# Altium PCB ECG_Board.PcbDoc (part 1 of 2)
Units mm, origin at the board's own origin, x right, y up, seen from the top; angles counter-clockwise.
Board outline 69.98 x 44.96 mm, 4 copper layers (Top Layer, Layer 1, Layer 2, Bottom Layer), stack 0.603 mm thick; 97 components, 77 nets, 390 pads, 9 vias.
Unrouted connection lines stored in the file: 228.
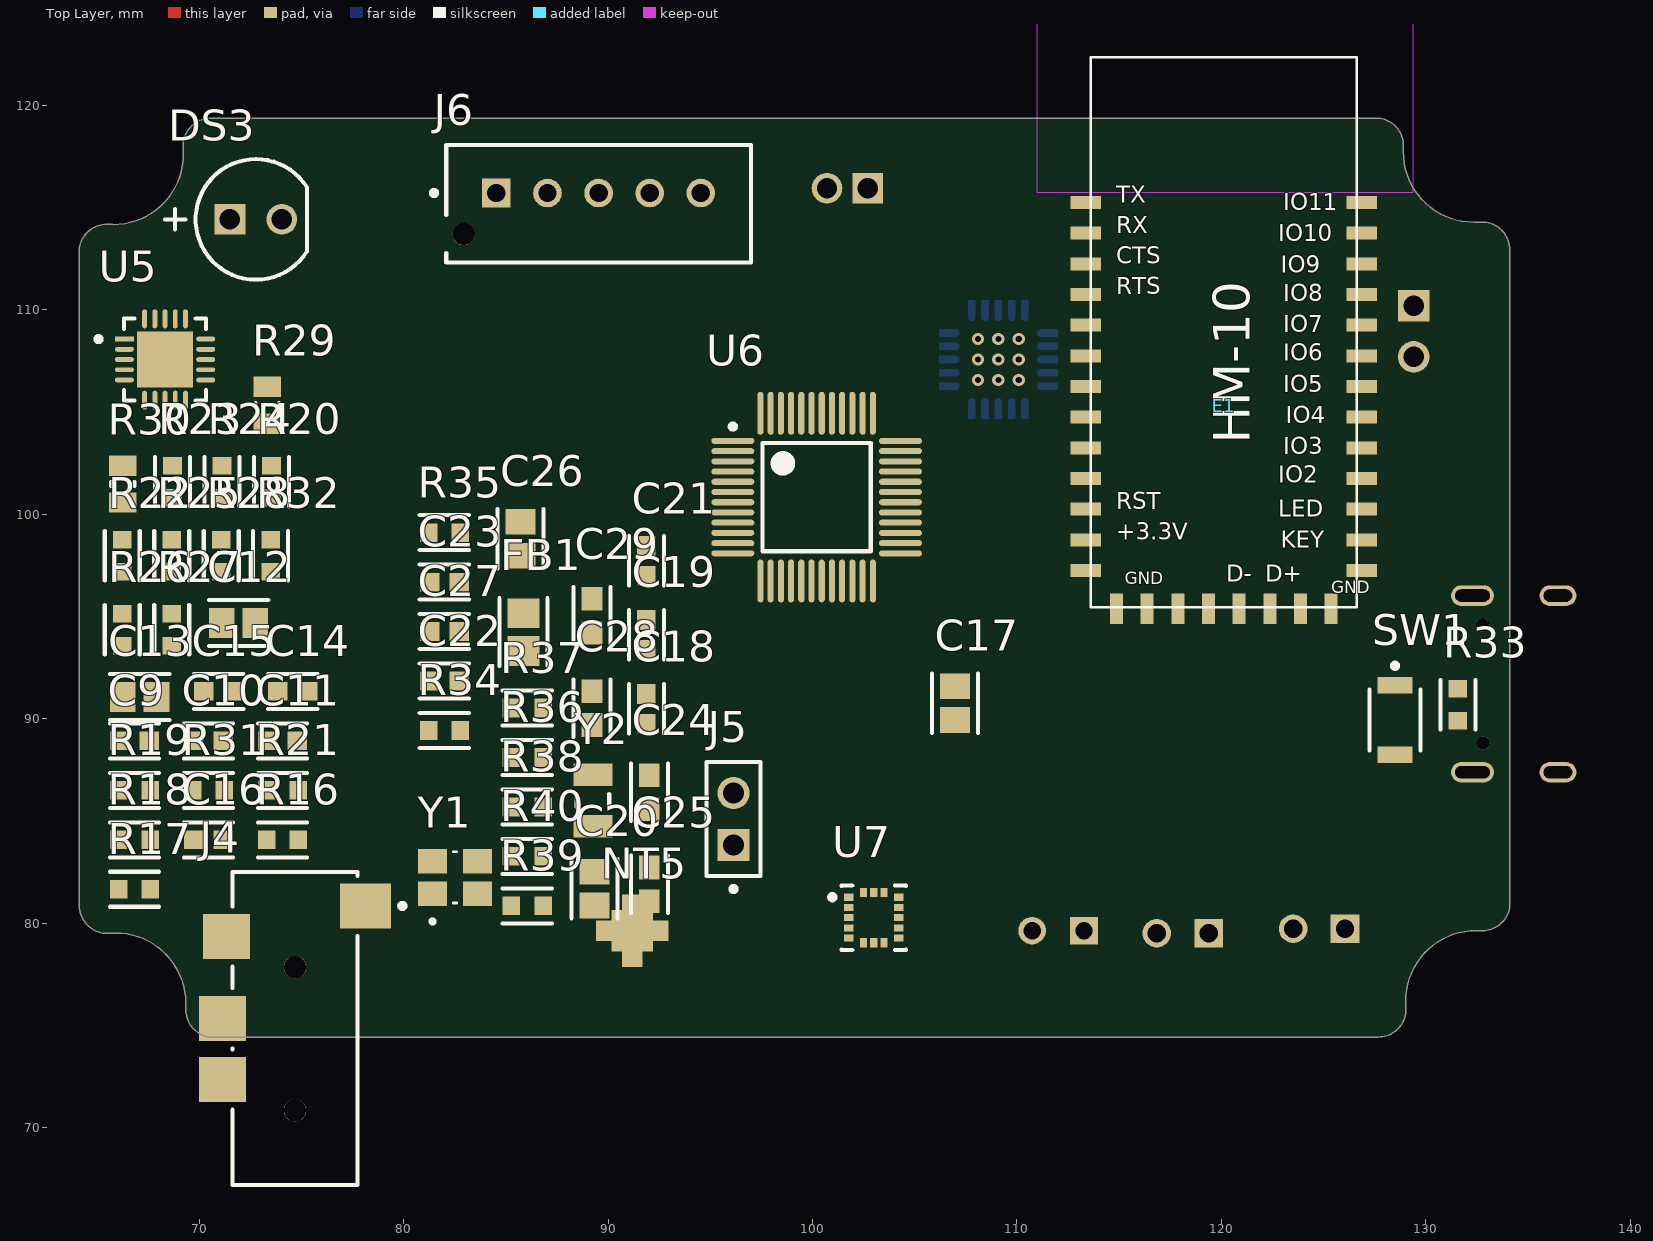
[diagram p0: Top Layer view]
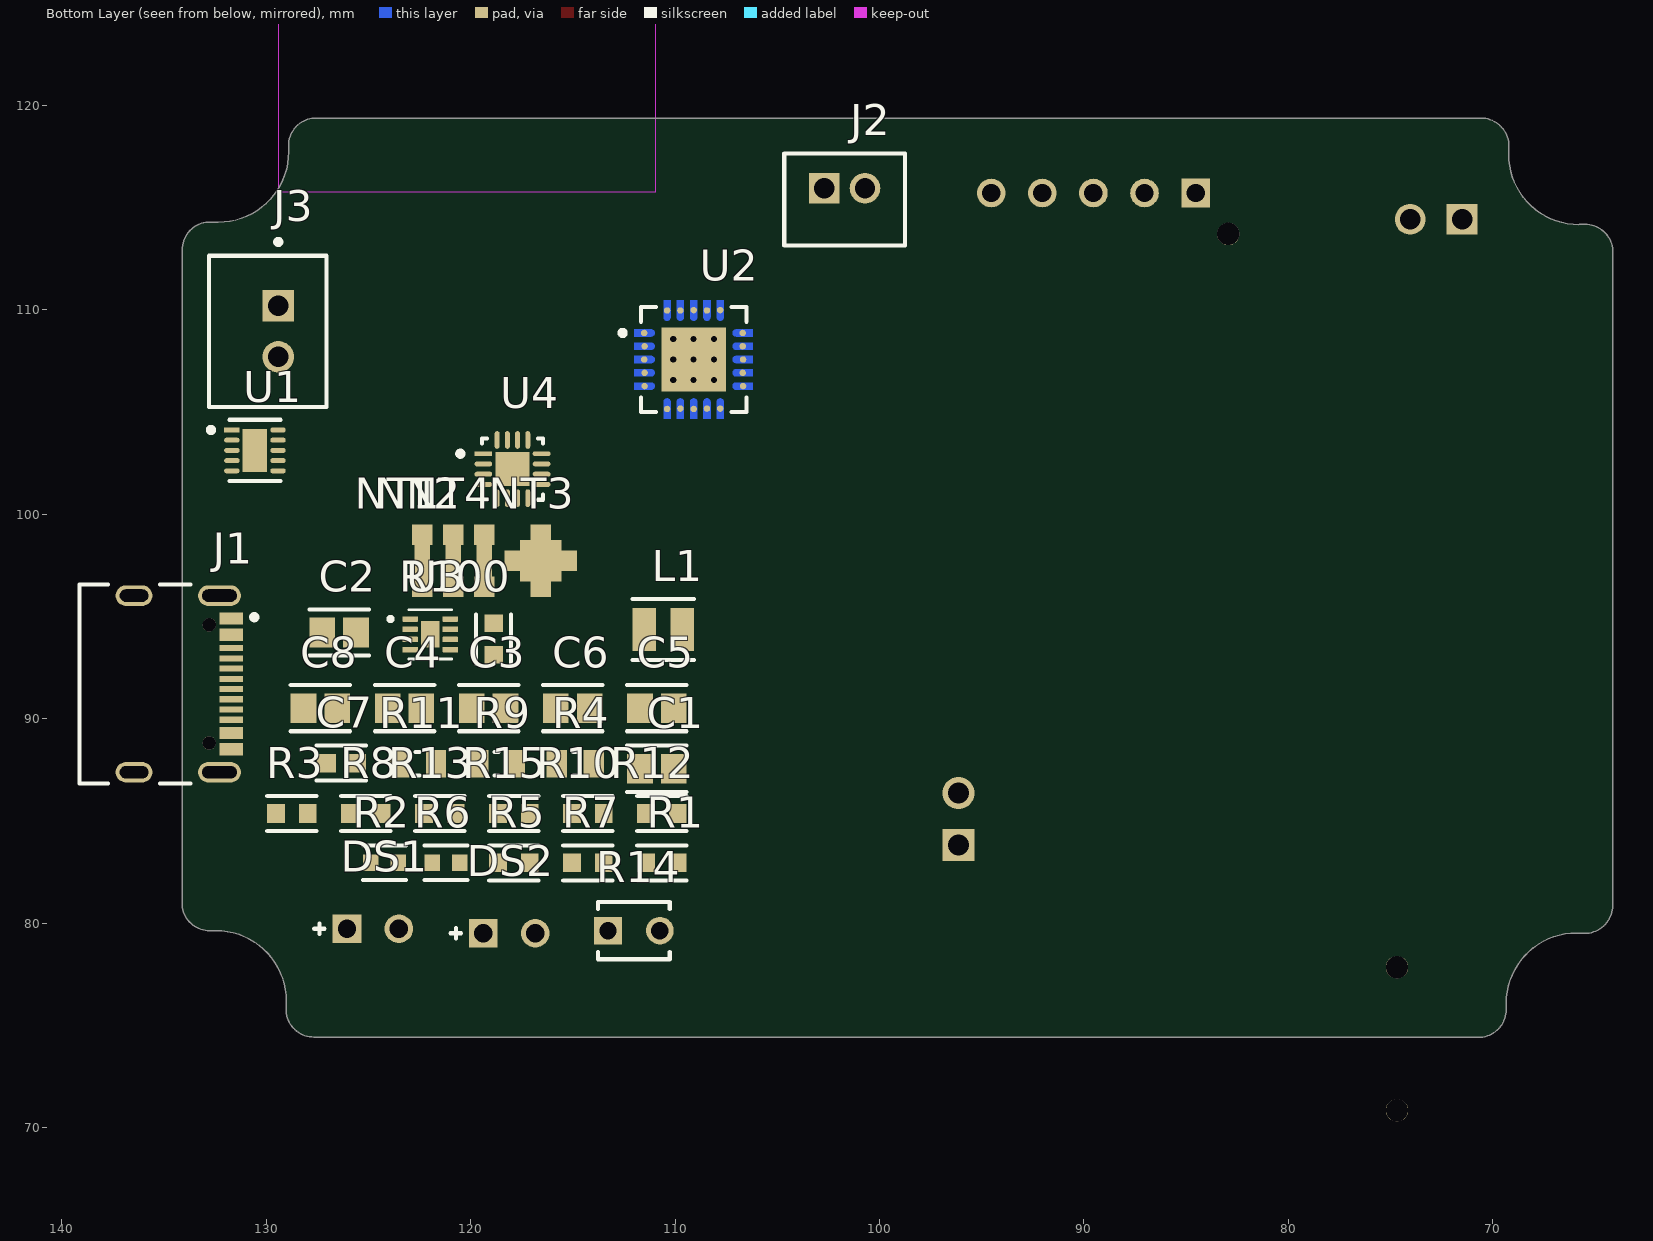
[diagram p1: Bottom Layer view, seen from below]
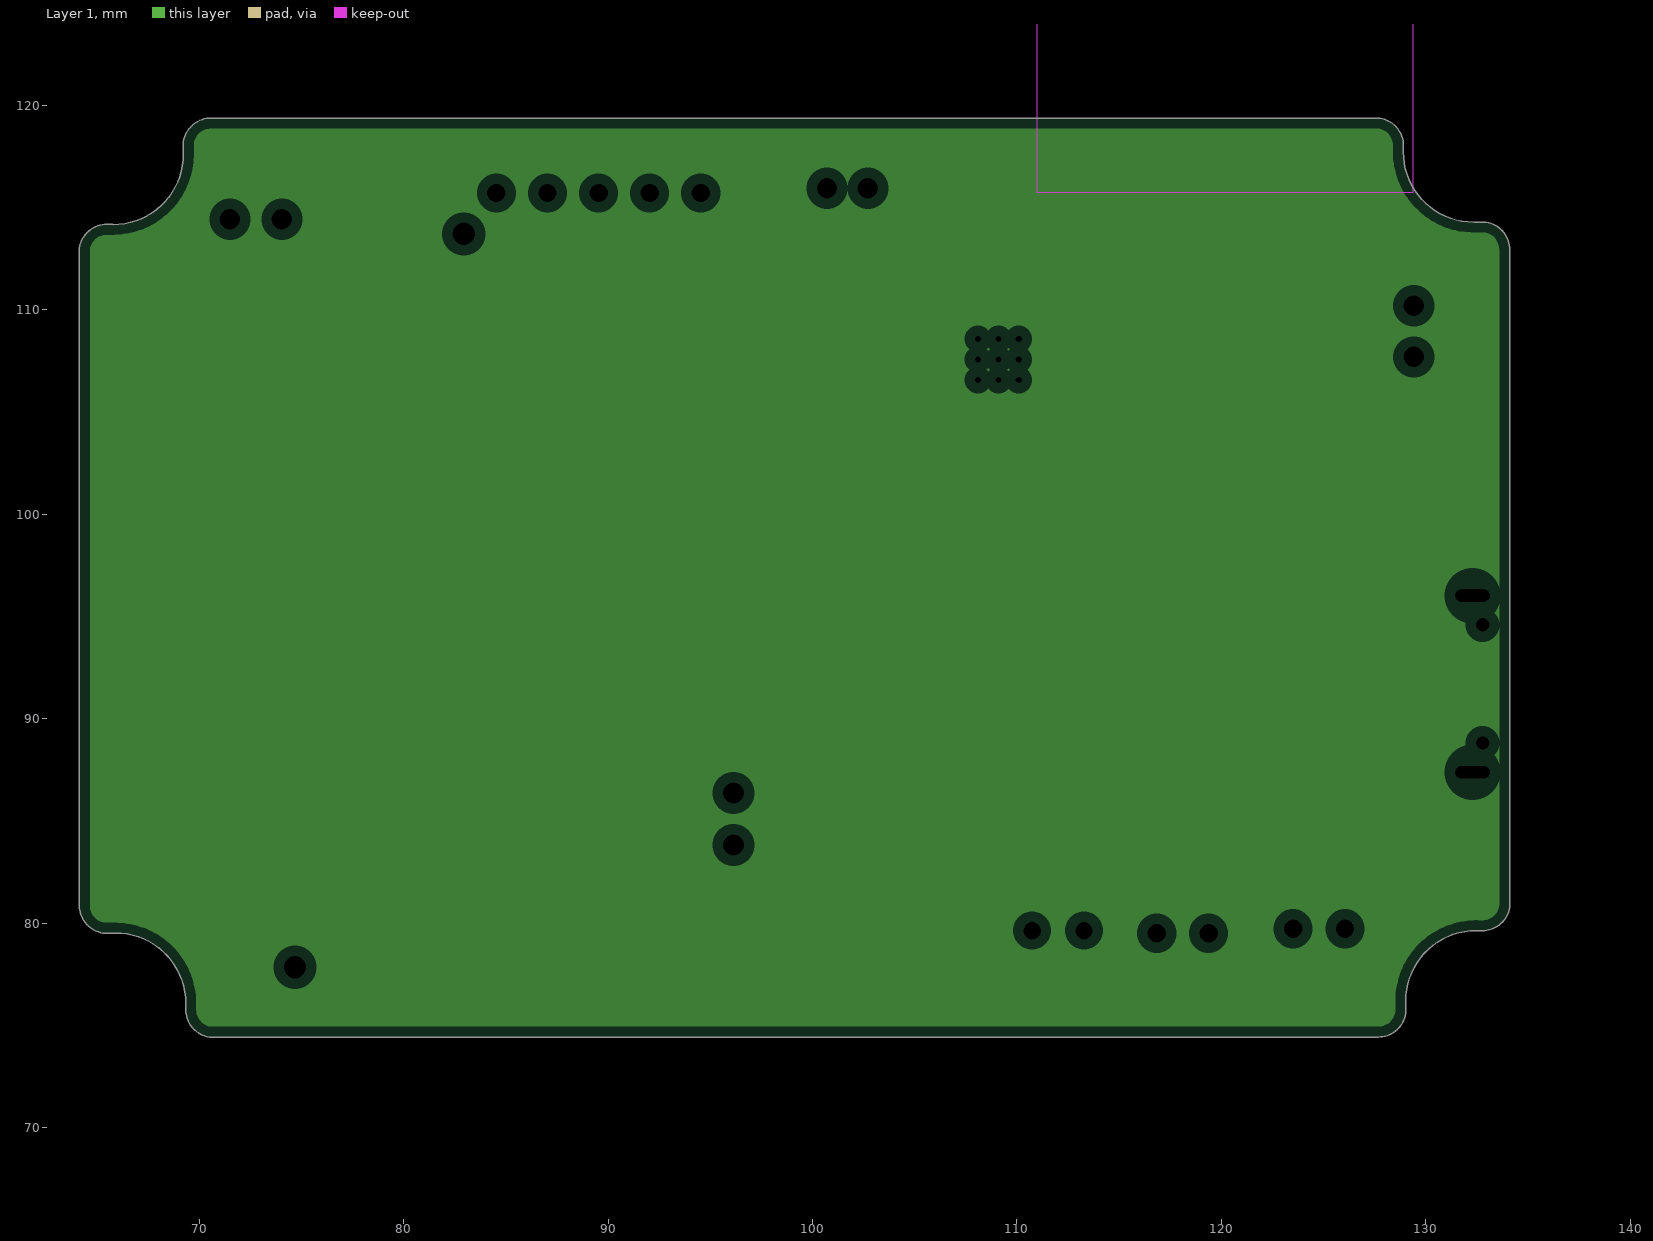
[diagram p2: Layer 1, clearances drawn from the general rule]
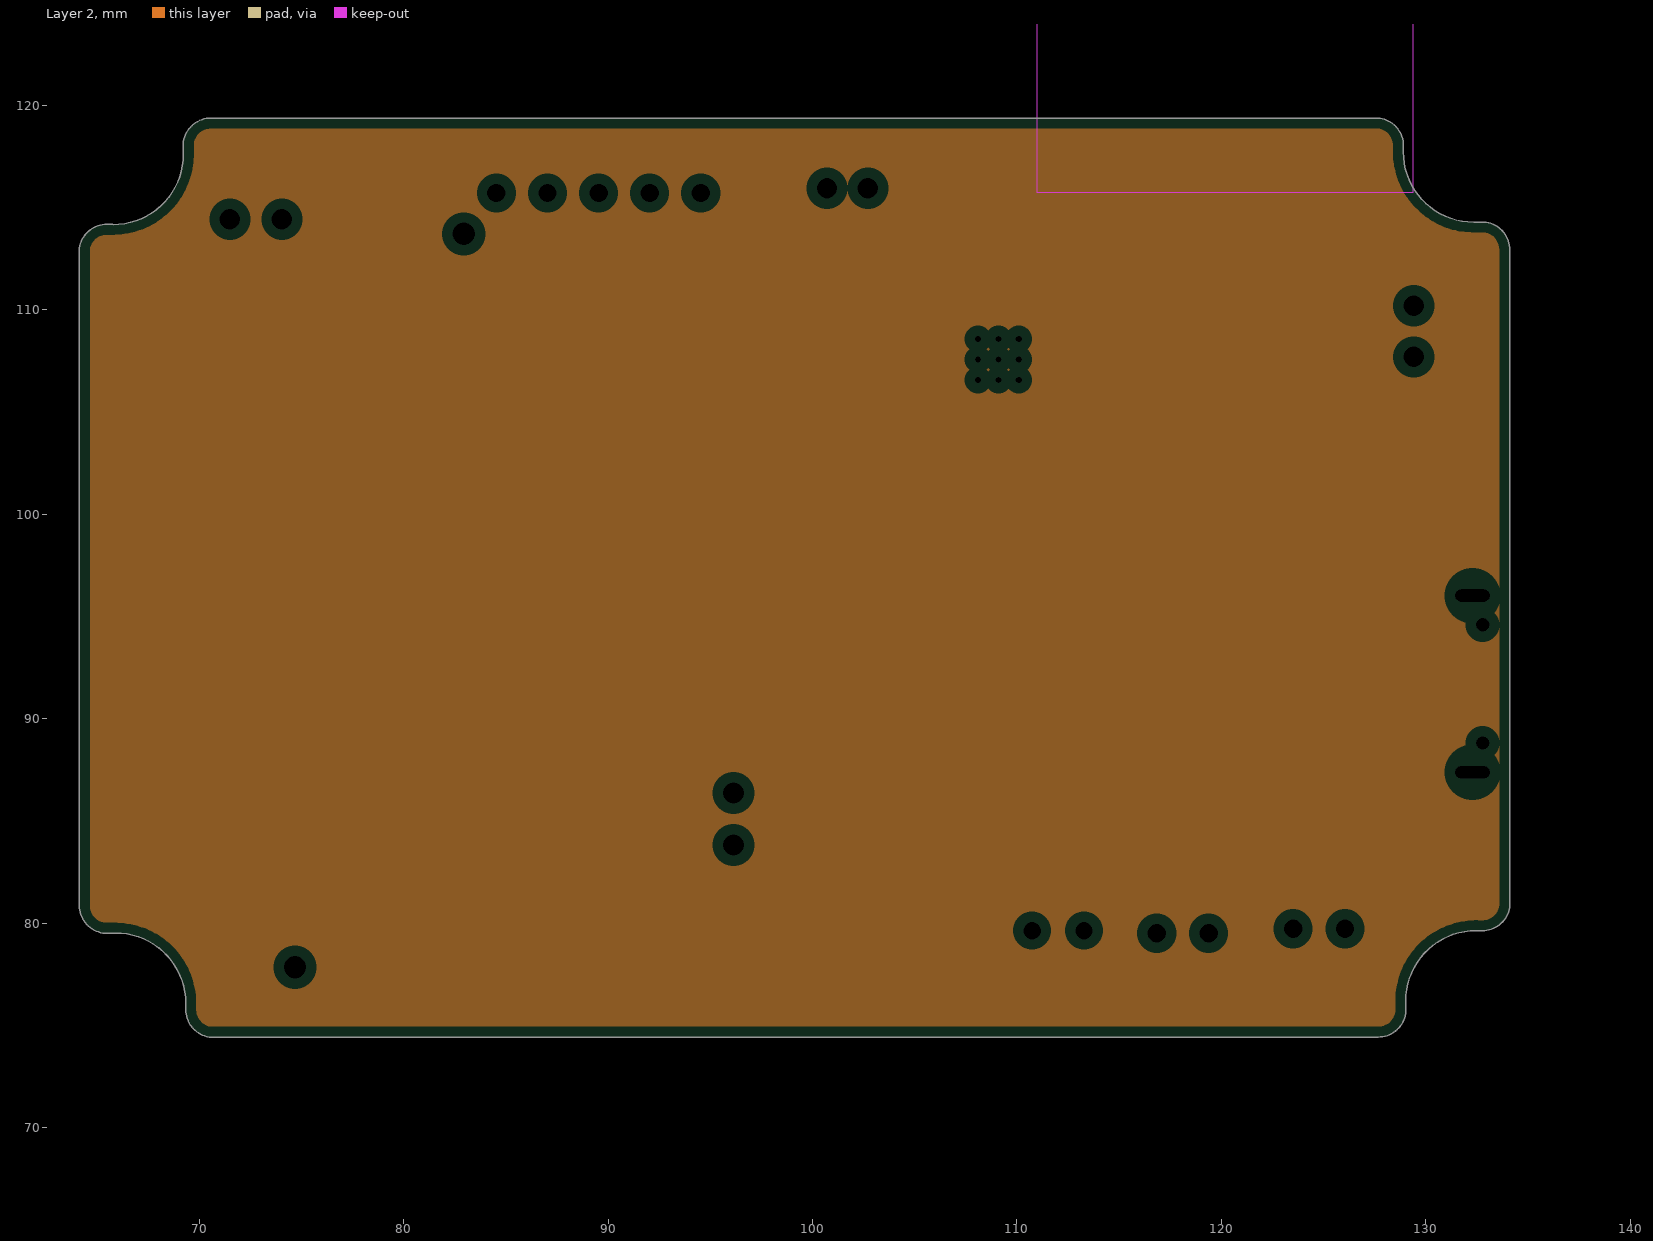
[diagram p3: Layer 2, clearances drawn from the general rule]

## Layer stack, top to bottom
Top Solder: solder mask 0.0102, Solder Resist, Dk 3.5
Top Layer: signal copper 0.0356
Dielectric 2: prepreg 0.0711, PP-006, Dk 4.1
Layer 1: plane copper 0.035
Dielectric 1: dielectric 0.32, FR-4, Dk 4.8
Layer 2: plane copper 0.035
Dielectric 3: prepreg 0.0711, PP-006, Dk 4.1
Bottom Layer: signal copper 0.0356
Bottom Solder: solder mask 0.0102, Solder Resist, Dk 3.5

## Board outline
65.285,79.512 65.903,79.512 cw(c65.903,76.073) 69.342,76.073 69.335,76.066 69.335,75.772 ccw(c70.702,75.772) 70.485,74.422 127.671,74.422 ccw(c127.671,75.79) 129.022,75.572 129.022,76.19 cw(c132.461,76.19) 132.461,79.629 132.468,79.622 132.762,79.622 ccw(c132.762,80.989) 134.112,80.772 134.112,113.03 134.112,112.939 ccw(c132.744,112.939) 132.962,114.29 132.344,114.29 cw(c132.344,117.729) 128.905,117.729 128.912,117.736 128.912,118.03 ccw(c127.545,118.03) 127.762,119.38 70.576,119.38 ccw(c70.576,118.012) 69.225,118.23 69.225,117.612 cw(c65.786,117.612) 65.786,114.173 65.779,114.18 65.485,114.18 ccw(c65.485,112.813) 64.135,113.03 64.135,112.395 64.135,80.863 ccw(c65.503,80.863)

## Design rules (kind name [scope] priority, off if disabled: settings)
Clearance [All] p1: gap=0.254 ignorepadtopadclearanceinfootprint=FALSE
PlaneClearance [All] p1: clearance=0.508
PlaneConnect [All] p1: planeconnectstyle=Relief reliefexpansion=0.508 reliefentries=4 reliefconductorwidth=0.254 reliefairgap=0.254
PolygonConnect [All] p1: connectstyle=Relief reliefconductorwidth=0.254 reliefentries=4 polygonreliefangle="90 Angle" airgapwidth=0.254
RoutingVias [All] p1: holewidth=0.711 width=1.27 viastyle="Through Hole" minholewidth=0.711 minwidth=1.27 maxholewidth=0.711 maxwidth=1.27
SolderMaskExpansion [All] p1: expansion=0 istentingtop=FALSE
SupplyNets "Schematic Supply Nets_5" [InNet('GND')] p1: voltage=0.000
SupplyNets "Schematic Supply Nets_3" [InNet('3V3')] p2: voltage=0.000
SupplyNets "Schematic Supply Nets_2" [InNet('Vin')] p3: voltage=0.000
Width [All] p1: maxlimit=0.254 minlimit=0.254 preferedwidth=0.254
28 further rules are at their usual default settings.

## Classes and differential pairs
component class ECG_AFE_AD8832: C9 C10 C11 C12 C13 C14 C15 C16 DS3 J4 R16 R17 R18 R19 R20 R21 R22 R23 R24 R25 R26 R27 R28 R29 R30 R31 R32 U5
component class ECG_MCU_Core: C18 C19 C20 C21 C22 C23 C24 C25 C26 C27 C28 C29 FB1 J5 J6 NT5 R34 R35 R36 R37 R38 R39 R40 U6 U7 Y1 Y2
component class ECG_BLE_radio: C17 E1 R33 SW1
component class ECG_PWR_MGMT: C1 C2 C3 C4 C5 C6 C7 C8 DS1 DS2 J1 J2 J3 L1 NT1 NT2 NT3 NT4 R1 R2 R3 R4 R5 R6 R7 R8 R9 R10 R11 R12 R13 R14 R15 R100 U1 U2 U3 U4

## Components (designator, comment, footprint, x,y, rotation, side; value= is the part's Value field where it differs from the comment)
C1 "10uF" CAP-0805-IPC_B 110.896,87.549 r180 bottom value=10µF
C2 "22uF" CAP-0805-IPC_B 126.437,94.221 r180 bottom value=22µF
C3 "10uF" CAP-0805-IPC_B 119.124,90.513 r180 bottom value=10µF
C4 "10uF" CAP-0805-IPC_B 123.239,90.513 r180 bottom value=10µF
C5 "1uF" CAP-0805-IPC_B 110.896,90.513 r180 bottom
C6 "1uF" CAP-0805-IPC_B 115.01,90.513 r180 bottom
C7 "100nF" CAP-0603-IPC_B 126.337,87.821 r180 bottom
C8 "4.7uF" CAP-0805-IPC_B 127.353,90.513 r180 bottom
C9 "100nF" CAP-0603-IPC_B 66.834,88.912 r0 top
C10 "100nF" CAP-0603-IPC_B 70.454,88.912 r0 top
C11 "330nF" CAP-0603-IPC_B 74.074,88.912 r0 top
C12 "4.7uF" CAP-0805-IPC_B 71.921,94.681 r0 top
C13 "4.7uF" CAP-0805-IPC_B 67.081,91.061 r0 top
C14 "1nF" CAP-0603-IPC_B 74.568,91.333 r0 top
C15 "2.7nF" CAP-0603-IPC_B 70.948,91.333 r0 top
C16 "6.8nF" CAP-0603-IPC_B 70.454,84.072 r0 top
C17 "10uF" CAP-0805-IPC_B 106.976,90.758 r90 top value=10µF
C18 "100nF" CAP-0603-IPC_B 91.87,90.479 r90 top
C19 "100nF" CAP-0603-IPC_B 91.87,94.099 r90 top
C20 "4.7uF" CAP-0805-IPC_B 89.334,81.686 r90 top
C21 "100nF" CAP-0603-IPC_B 91.87,97.72 r90 top
C22 "100nF" CAP-0603-IPC_B 81.994,91.84 r180 top
C23 "100nF" CAP-0603-IPC_B 81.994,96.68 r180 top
C24 "CAP-0603-16pF" FP-GCM188-0_1-IPC_A_murata 92.02,86.409 r90 top
C25 "CAP-0603-16pF" FP-GCM188-0_1-IPC_A_murata 92.02,81.889 r90 top
C26 "1uF" CAP-0805-IPC_B 85.714,98.801 r90 top
C27 "10nF" CAP-0603-IPC_B 81.994,94.26 r180 top
C28 "CAP-0603-8pF" FP-GCM188-0_1-IPC_A_murata 89.212,90.511 r90 top
C29 "CAP-0603-8pF" FP-GCM188-0_1-IPC_A_murata 89.212,95.031 r90 top
DS1 "LTL-1CHG" LTST-LTL-1CHG-2 124.785,79.721 r180 bottom
DS2 "LTL-1CHG" LTST-LTL-1CHG-2 118.11,79.502 r180 bottom
DS3 "G502DC" CGX-G502DC 72.771,114.427 r0 top
E1 "HM-10" HM-10 120.873,115.251 r0 top
FB1 "BLM21AG601SN1D" "Ferrite bead" 85.864,94.237 r90 top
J1 "USB4105-GF-A" FP-USB4105-GF-A-MFG 135.306,91.698 r270 bottom
J2 "B2B-PH-K-S(LF)(SN)" JST-B2B-PH-K-S_V 101.711,115.401 r180 bottom
J3 "B2B-XH-A(LF)(SN)" FP-B2B-XH-A_LF_SN-MFG 129.938,108.946 r270 bottom
J4 "SJ2-3574A-SMT-TR" FP-SJ2-3574A-SMT-TR-MFG 74.684,74.839 r90 top
J5 "M20-9990246" FP-M20-9990246-MFG 96.139,85.09 r90 top
J6 "B5B-XH-AM(LF)(SN)" FP-B5B-XH-AM_LF_SN-MFG 89.535,115.189 r180 top
L1 "LQM2HPN2R2MG0L" FP-LQM2HPN_G0-IPC_C 110.58,94.361 r180 bottom
NT1 "NET-TIE 2pin SMD" "NET TIE SMD 2 pin" 122.363,97.727 r90 bottom
NT2 "NET-TIE 2pin SMD" "NET TIE SMD 2 pin" 120.855,97.727 r90 bottom
NT3 "NET-TIE SMD" "NET TIE SMD" 116.569,97.727 r180 bottom
NT4 "NET-TIE 2pin SMD" "NET TIE SMD 2 pin" 119.347,97.727 r90 bottom
NT5 "NET-TIE SMD" "NET TIE SMD" 91.186,79.629 r0 top
R1 "0 ohm" RES-0603-IPC_B 110.649,82.942 r180 bottom
R2 "RK73H1JRTTD5101F" FP-RK73H1J-IPC_C 124.221,82.949 r180 bottom
R3 "0 ohm" RES-0603-IPC_B 128.75,85.363 r180 bottom
R4 "1.87k" "RES 0805 Medium" 114.882,87.802 r180 bottom value=1.87kΩ
R5 "8.25k" RES-0603-IPC_B 117.889,82.942 r180 bottom value=8.25kΩ
R6 "RK73H1JRTTD5101F" FP-RK73H1J-IPC_C 121.206,82.949 r180 bottom
R7 "0 ohm" RES-0603-IPC_B 114.269,82.942 r180 bottom
R8 "0 ohm" RES-0603-IPC_B 125.13,85.363 r180 bottom
R9 "1.5k" "RES 0805 Medium" 118.74,87.802 r180 bottom
R10 "1.18k" RES-0603-IPC_B 114.269,85.363 r180 bottom
R11 "1.5k" "RES 0805 Medium" 122.598,87.802 r180 bottom
R12 "4.12k" RES-0603-IPC_B 110.649,85.363 r180 bottom
R13 "1.13k" RES-0603-IPC_B 121.509,85.363 r180 bottom
R14 "NTCLE101E3C90173" FP-NTCLE101E3C90173-MFG 112.014,79.629 r180 bottom
R15 "0 ohm" RES-0603-IPC_B 117.889,85.363 r180 bottom
R16 "10M" RES-0603-IPC_B 74.074,84.072 r0 top
R17 "10M" RES-0603-IPC_B 66.834,81.652 r0 top
R18 "1.4M" RES-0603-IPC_B 66.834,84.072 r0 top
R19 "10M" RES-0603-IPC_B 66.834,86.492 r0 top
R20 "10M" RES-0603-IPC_B 73.532,101.593 r90 top
R21 "10M" RES-0603-IPC_B 74.074,86.492 r0 top
R22 "10M" RES-0603-IPC_B 66.234,97.973 r90 top
R23 "1M" RES-0603-IPC_B 68.692,101.593 r90 top
R24 "180k" RES-0603-IPC_B 71.112,101.593 r90 top
R25 "100k" RES-0603-IPC_B 68.654,97.973 r90 top
R26 "180k" RES-0603-IPC_B 66.234,94.353 r90 top
R27 "1M" RES-0603-IPC_B 68.654,94.353 r90 top
R28 "1M" RES-0603-IPC_B 71.074,97.973 r90 top
R29 "360K" "RES 0805 Medium" 73.323,105.332 r90 top
R30 "332K" "RES 0805 Medium" 66.253,101.474 r90 top
R31 "1M" RES-0603-IPC_B 70.454,86.492 r0 top
R32 "1.5k RES-0603-IPC-B_2" RES-0603-IPC_B 73.494,97.973 r90 top
R33 "10k" RES-0603-IPC_B 131.572,90.678 r270 top
R34 "10k" RES-0603-IPC_B 81.994,89.42 r180 top
R35 "0ohm" RES-0603-IPC_B 81.994,99.101 r180 top
R36 "10k" RES-0603-IPC_B 86.042,88.099 r180 top
R37 "10k" RES-0603-IPC_B 86.042,90.52 r180 top
R38 "10k" RES-0603-IPC_B 86.042,85.679 r180 top
R39 "10k" RES-0603-IPC_B 86.042,80.839 r180 top
R40 "0 ohm" RES-0603-IPC_B 86.042,83.259 r180 top
R100 "1k RES-0603-IPC-B_1" RES-0603-IPC_B 118.877,93.893 r90 bottom
SW1 "B3U-1000P" OMRON-B3U-1000_V 128.502,89.935 r270 top
U1 "TPS63900DSKR" FP-DSK0010A-IPC_C 130.556,103.124 r180 bottom
U2 "TPS7A4700RGWR" FP-RGW0020A-MFG 109.093,107.569 r180 bottom
U3 "MAX17048G+T10" max17048g+t10 121.981,94.124 r180 bottom
U4 "BQ24074RGTR" FP-RGT0016C-IPC_B 117.957,102.211 r180 bottom
U5 "AD8232ACPZ-WP" FP-CP-20-8-IPC_A 68.326,107.569 r0 top
U6 "STM32F103C8T6" STM-LQFP48_M 100.203,100.838 r0 top
U7 "LIS3DHTR" FP-LGA-16-7983231-MFG 102.997,80.264 r0 top
Y1 "ABM8AIG-8.000MHZ-1Z-T_1" XTAL_ABM8AIG-8.000MHZ-1Z-T 82.513,82.233 r90 top
Y2 "ABS07-32.768KHZ-6-T" FP-ABS07-MFG 89.256,85.997 r90 top

## Footprints (in the part's own frame and the unit in brackets; to place one, negate y for a bottom-side part, rotate by r counter-clockwise, add the part's x,y. Pads: shape width x height; smd on the part's side, far side on the other; paste and mask are expansions set on the pad)
CAP-0603-IPC_B [mm]
  rect 0.959x0.912 smd paste+0 mask+0: 1(-0.727,0) 2(0.727,0)
  silkscreen extent -1.21,-0.86 1.21,0.86, body extent -0.8,-0.4 0.8,0.4, height 0.9
CAP-0805-IPC_B [mm]
  rect 1.255x1.456 smd paste+0 mask+0: 1(-0.826,0) 2(0.826,0)
  silkscreen extent -1.45,-1.13 1.45,1.13, body extent -1,-0.63 1,0.63, height 1.45
CGX-G502DC [mm] "THD, 2-Leads, Dia 5.9mm, Pin Spacing 2.54mm"
  rect 1.5x1.5 hole 1: 1(-1.27,0)
  round 1.5 hole 1: 2(1.27,0)
  silkscreen extent -4.45,-2.95 2.5,2.95, body extent -2.95,-2.95 2.5,2.95, height 9.1
"Ferrite bead" [mm]
  rect 1.455x1.556 smd paste+0 mask+0: 1(-0.926,0) 2(0.926,0)
  silkscreen extent -1.65,-1.18 1.65,1.18, body extent -2.15,-1.28 2.15,1.28, height 0.25
FP-ABS07-MFG [mm]
  rect 1.1x1.9 smd paste+0 mask+0: 1(-1.25,0) 2(1.25,0)
  silkscreen extent -0.33,-0.8 0.33,0.8, body extent -1.9,-1.05 1.9,1.05, height 0.25
FP-B2B-XH-A_LF_SN-MFG [mm]
  rect 1.55x1.55 hole 1 paste-2539.97 mask+0: 1(-1.25,0.525)
  round 1.55 hole 1 paste-2539.97 mask+0: 2(1.25,0.525)
  silkscreen extent -4.5,-2.88 3.7,2.88, body extent -3.7,-2.88 3.7,2.88, height 7
FP-B5B-XH-AM_LF_SN-MFG [mm]
  rect 1.4x1.4 hole 0.9 paste-2539.97 mask+0: 1(5,-0.525)
  round 1.4 hole 0.9 paste-2539.97 mask+0: 2(2.5,-0.525) 3(0,-0.525) 4(-2.5,-0.525) 5(-5,-0.525)
  round 1.1 hole 1.1 unplated paste-2539.97 mask+0: ""(6.6,1.475)
  silkscreen extent -7.45,-2.88 8.17,2.88, body extent -7.55,-2.98 7.55,2.98, height 0.25
FP-CP-20-8-IPC_A [mm]
  rect 0.931x0.239 smd paste+0 mask+0: 1(-1.991,1)
  rrect100% 0.931x0.239 smd paste+0 mask+0: 2(-1.991,0.5) 3(-1.991,0) 4(-1.991,-0.5) 5(-1.991,-1) 11(1.991,-1) 12(1.991,-0.5) 13(1.991,0) 14(1.991,0.5) 15(1.991,1)
  rrect100% 0.239x0.931 smd paste+0 mask+0: 6(-1,-1.991) 7(-0.5,-1.991) 8(0,-1.991) 9(0.5,-1.991) 10(1,-1.991) 16(1,1.991) 17(0.5,1.991) 18(0,1.991) 19(-0.5,1.991) 20(-1,1.991)
  rect 2.75x2.75 smd paste-1000 mask+0: 21(0,0)
  silkscreen extent -3.38,-2 2,2, body extent -2.96,-2.96 2.96,2.96, height 0.25
FP-DSK0010A-IPC_C [mm]
  rect 0.756x0.242 smd paste+0 mask+0: 1(-1.128,1)
  rrect100% 0.756x0.242 smd paste+0 mask+0: 2(-1.128,0.5) 3(-1.128,0) 4(-1.128,-0.5) 5(-1.128,-1) 6(1.128,-1) 7(1.128,-0.5) 8(1.128,0) 9(1.128,0.5) 10(1.128,1)
  rect 1.2x2.1 smd paste-1000 mask+0: 11(0,0)
  silkscreen extent -2.28,-1.5 1.25,1.5, body extent -1.23,-1.25 1.27,1.25, height 0.8
FP-GCM188-0_1-IPC_A_murata [mm]
  rect 1.159x1.012 smd paste+0 mask+0: 1(-0.827,0) 2(0.827,0)
  silkscreen extent -1.41,-0.91 1.41,0.91, body extent -1.91,-1.01 1.91,1.01, height 0.25
FP-LGA-16-7983231-MFG [mm]
  rect 0.45x0.35 smd paste-1000 mask+0: 1(-1.225,1) 2(-1.225,0.5) 3(-1.225,0) 4(-1.225,-0.5) 5(-1.225,-1) 9(1.225,-1) 10(1.225,-0.5) 11(1.225,0) 12(1.225,0.5) 13(1.225,1)
  rect 0.35x0.45 smd paste-1000 mask+0: 6(-0.5,-1.225) 7(0,-1.225) 8(0.5,-1.225) 14(0.5,1.225) 15(0,1.225) 16(-0.5,1.225)
  silkscreen extent -2.15,-1.58 1.58,1.58, body extent -2.07,-2.07 2.07,2.07, height 0.25
FP-LQM2HPN_G0-IPC_C [mm]
  rect 1.155x2.106 smd paste+0 mask+0: 1(-0.926,0) 2(0.926,0)
  silkscreen extent -1.5,-1.5 1.5,1.5, body extent -1.25,-1 1.25,1, height 1
FP-M20-9990246-MFG [mm]
  rect 1.57x1.57 hole 1.02 paste-2539.97 mask+0: 1(-1.27,0)
  round 1.57 hole 1.02 paste-2539.97 mask+0: 2(1.27,0)
  silkscreen extent -3.55,-1.32 2.79,1.32, body extent -2.89,-1.42 2.89,1.42, height 0.25
FP-NTCLE101E3C90173-MFG [mm]
  rect 1.35x1.35 hole 0.85 paste-2539.97 mask+0: 1(-1.27,0)
  round 1.35 hole 0.85 paste-2539.97 mask+0: 2(1.27,0)
  silkscreen extent -1.75,-1.4 1.75,1.4, body extent -1.75,-1.4 1.75,1.4, height 8
FP-RGT0016C-IPC_B [mm]
  rect 0.866x0.239 smd paste+0 mask+0: 1(-1.423,0.75)
  rrect100% 0.866x0.239 smd paste+0 mask+0: 2(-1.423,0.25) 3(-1.423,-0.25) 4(-1.423,-0.75) 9(1.423,-0.75) 10(1.423,-0.25) 11(1.423,0.25) 12(1.423,0.75)
  rrect100% 0.239x0.866 smd paste+0 mask+0: 5(-0.75,-1.423) 6(-0.25,-1.423) 7(0.25,-1.423) 8(0.75,-1.423) 13(0.75,1.423) 14(0.25,1.423) 15(-0.25,1.423) 16(-0.75,1.423)
  rect 1.68x1.68 smd paste-1000 mask+0: 17(0,0)
  silkscreen extent -2.68,-1.5 1.5,1.5, body extent -1.5,-1.5 1.5,1.5, height 1
FP-RGW0020A-MFG [mm]
  round 0.315 smd paste-1000 mask+0: 1(-2.418,1.3) 2(-2.4,0.65) 3(-2.418,0) 4(-2.4,-0.65) 5(-2.4,-1.3) 6(-1.3,-2.418) 7(-0.65,-2.4) 8(0,-2.418) 9(0.65,-2.4) 10(1.3,-2.4) 11(2.418,-1.3) 12(2.4,-0.65) 13(2.418,0) 14(2.4,0.65) 15(2.4,1.3) 16(1.3,2.418) 17(0.65,2.4) 18(0,2.418) 19(-0.65,2.4) 20(-1.3,2.4)
  rect 3.15x3.15 smd paste-1000 mask+0: 21(0,0)
  Top Layer region: -1.125,2.9 -1.125,2.075 -1.138,2.008 -1.176,1.951 -1.233,1.913 -1.3,1.9 -1.3,1.9 -1.367,1.913 -1.424,1.951 -1.462,2.008 -1.475,2.075 -1.475,2.075 -1.475,2.9
  Top Layer region: -0.475,2.9 -0.475,2.075 -0.488,2.008 -0.526,1.951 -0.583,1.913 -0.65,1.9 -0.65,1.9 -0.717,1.913 -0.774,1.951 -0.812,2.008 -0.825,2.075 -0.825,2.075 -0.825,2.9
  Top Layer region: 0.175,2.9 0.175,2.075 0.162,2.008 0.124,1.951 0.067,1.913 0,1.9 0,1.9 -0.067,1.913 -0.124,1.951 -0.162,2.008 -0.175,2.075 -0.175,2.075 -0.175,2.9
  Top Layer region: 0.825,2.9 0.825,2.075 0.812,2.008 0.774,1.951 0.717,1.913 0.65,1.9 0.65,1.9 0.583,1.913 0.526,1.951 0.488,2.008 0.475,2.075 0.475,2.075 0.475,2.9
  Top Layer region: 1.475,2.9 1.475,2.075 1.462,2.008 1.424,1.951 1.367,1.913 1.3,1.9 1.3,1.9 1.233,1.913 1.176,1.951 1.138,2.008 1.125,2.075 1.125,2.075 1.125,2.9
  Top Layer region: 1.125,-2.9 1.125,-2.075 1.138,-2.008 1.176,-1.951 1.233,-1.913 1.3,-1.9 1.3,-1.9 1.367,-1.913 1.424,-1.951 1.462,-2.008 1.475,-2.075 1.475,-2.075 1.475,-2.9
  Top Layer region: 0.475,-2.9 0.475,-2.075 0.488,-2.008 0.526,-1.951 0.583,-1.913 0.65,-1.9 0.65,-1.9 0.717,-1.913 0.774,-1.951 0.812,-2.008 0.825,-2.075 0.825,-2.075 0.825,-2.9
  Top Layer region: -0.175,-2.9 -0.175,-2.075 -0.162,-2.008 -0.124,-1.951 -0.067,-1.913 0,-1.9 0,-1.9 0.067,-1.913 0.124,-1.951 0.162,-2.008 0.175,-2.075 0.175,-2.075 0.175,-2.9
  Top Layer region: -0.825,-2.9 -0.825,-2.075 -0.812,-2.008 -0.774,-1.951 -0.717,-1.913 -0.65,-1.9 -0.65,-1.9 -0.583,-1.913 -0.526,-1.951 -0.488,-2.008 -0.475,-2.075 -0.475,-2.075 -0.475,-2.9
  Top Layer region: -1.475,-2.9 -1.475,-2.075 -1.462,-2.008 -1.424,-1.951 -1.367,-1.913 -1.3,-1.9 -1.3,-1.9 -1.233,-1.913 -1.176,-1.951 -1.138,-2.008 -1.125,-2.075 -1.125,-2.075 -1.125,-2.9
  Top Layer region: 2.9,1.125 2.075,1.125 2.008,1.138 1.951,1.176 1.913,1.233 1.9,1.3 1.9,1.3 1.913,1.367 1.951,1.424 2.008,1.462 2.075,1.475 2.075,1.475 2.9,1.475
  Top Layer region: 2.9,0.475 2.075,0.475 2.008,0.488 1.951,0.526 1.913,0.583 1.9,0.65 1.9,0.65 1.913,0.717 1.951,0.774 2.008,0.812 2.075,0.825 2.075,0.825 2.9,0.825
  Top Layer region: 2.9,-0.175 2.075,-0.175 2.008,-0.162 1.951,-0.124 1.913,-0.067 1.9,0 1.9,0 1.913,0.067 1.951,0.124 2.008,0.162 2.075,0.175 2.075,0.175 2.9,0.175
  Top Layer region: 2.9,-0.825 2.075,-0.825 2.008,-0.812 1.951,-0.774 1.913,-0.717 1.9,-0.65 1.9,-0.65 1.913,-0.583 1.951,-0.526 2.008,-0.488 2.075,-0.475 2.075,-0.475 2.9,-0.475
  Top Layer region: 2.9,-1.475 2.075,-1.475 2.008,-1.462 1.951,-1.424 1.913,-1.367 1.9,-1.3 1.9,-1.3 1.913,-1.233 1.951,-1.176 2.008,-1.138 2.075,-1.125 2.075,-1.125 2.9,-1.125
  Top Layer region: -2.9,-1.125 -2.075,-1.125 -2.008,-1.138 -1.951,-1.176 -1.913,-1.233 -1.9,-1.3 -1.9,-1.3 -1.913,-1.367 -1.951,-1.424 -2.008,-1.462 -2.075,-1.475 -2.075,-1.475 -2.9,-1.475
  Top Layer region: -2.9,-0.475 -2.075,-0.475 -2.008,-0.488 -1.951,-0.526 -1.913,-0.583 -1.9,-0.65 -1.9,-0.65 -1.913,-0.717 -1.951,-0.774 -2.008,-0.812 -2.075,-0.825 -2.075,-0.825 -2.9,-0.825
  Top Layer region: -2.9,0.175 -2.075,0.175 -2.008,0.162 -1.951,0.124 -1.913,0.067 -1.9,0 -1.9,0 -1.913,-0.067 -1.951,-0.124 -2.008,-0.162 -2.075,-0.175 -2.075,-0.175 -2.9,-0.175
  Top Layer region: -2.9,0.825 -2.075,0.825 -2.008,0.812 -1.951,0.774 -1.913,0.717 -1.9,0.65 -1.9,0.65 -1.913,0.583 -1.951,0.526 -2.008,0.488 -2.075,0.475 -2.075,0.475 -2.9,0.475
  Top Layer region: -2.9,1.475 -2.075,1.475 -2.008,1.462 -1.951,1.424 -1.913,1.367 -1.9,1.3 -1.9,1.3 -1.913,1.233 -1.951,1.176 -2.008,1.138 -2.075,1.125 -2.075,1.125 -2.9,1.125
  silkscreen extent -3.6,-2.58 2.58,2.58, body extent -2.5,-2.5 2.5,2.5, height 1
FP-RK73H1J-IPC_C [mm]
  rect 0.756x0.812 smd paste+0 mask+0: 1(-0.675,0) 2(0.675,0)
  silkscreen extent -1.05,-0.85 1.05,0.85, body extent -0.8,-0.4 0.8,0.4, height 0.55
FP-SJ2-3574A-SMT-TR-MFG [mm]
  rect 2.2x2.5 smd paste+0 mask+0: 1(6,-3.45)
  rect 2.2x2.3 smd paste+0 mask+0: 2(4.5,3.35) 3(0.5,3.55) 4(-2.5,3.55)
  round 1.1 hole 1.1 unplated paste-2539.97 mask+0: ""(-4,0) ""(3,0)
  silkscreen extent -7.65,-5.38 7.65,3.05, body extent -7.75,-4.8 7.75,4.8, height 0.25
FP-USB4105-GF-A-MFG [mm]
  rrect100% 1x2.1 hole 1.7 slot 0.6 at 0 deg paste-2539.97 mask+0: 1(-4.32,3.015) 2(4.32,3.015)
  rrect100% 1x1.8 hole 1.4 slot 0.6 at 0 deg paste-2539.97 mask+0: 3(-4.32,-1.165) 4(4.32,-1.165)
  rect 0.6x1.15 smd paste+0 mask+0: A1-B12(-3.2,3.59) A4-B9(-2.4,3.59) B1-A12(3.2,3.59) B4-A9(2.4,3.59)
  rect 0.3x1.15 smd paste+0 mask+0: A5(-1.25,3.59) A6(-0.25,3.59) A7(0.25,3.59) A8(1.25,3.59) B5(1.75,3.59) B6(0.75,3.59) B7(-0.75,3.59) B8(-1.75,3.59)
  round 0.65 hole 0.65 unplated paste-2539.97 mask+0: ""(-2.89,2.515) ""(2.89,2.515)
  silkscreen extent -4.86,-3.84 4.86,4.84, body extent -4.79,-3.76 4.79,3.77, height 3.26
HM-10 [mm]
  rect 1.5x0.635 smd: 1(-7.5,0) 2(-7.5,-1.5) 3(-7.5,-3) 4(-7.5,-4.5) 5(-7.5,-6) 6(-7.5,-7.5) 8(-7.5,-10.5) 9(-7.5,-12) 10(-7.5,-13.5) 11(-7.5,-15) 12(-7.5,-16.5) 13(-7.5,-18) 22(6,-18) 23(6,-16.5) 24(6,-15) 25(6,-13.5) 26(6,-12) 27(6,-10.5) 28(6,-9) 29(6,-7.5) 30(6,-6) 31(6,-4.5) 32(6,-3) 33(6,-1.5) 34(6,0) $7(-7.5,-9)
  rect 0.635x1.5 smd: 14(-6,-19.875) 15(-4.5,-19.875) 16(-3,-19.875) 17(-1.5,-19.875) 18(0,-19.875) 19(1.5,-19.875) 20(3,-19.875) 21(4.5,-19.875)
  Top Layer keep-out region: -9.906,0.508 8.509,0.508 8.509,10.033 -9.906,10.033
  Keep-Out Layer region: -9.906,0.508 8.509,0.508 8.509,10.033 -9.906,10.033
  silkscreen extent -7.25,-19.8 5.75,7.1, body extent -7.26,-19.8 5.74,7.1, height 2.2
JST-B2B-PH-K-S_V [mm] "Connector, 2-Leads, Body 5.9x4.5mm, Pitch 2mm"
  rect 1.5x1.5 hole 1: 1(-1,0.55)
  round 1.5 hole 1: 2(1,0.55)
  silkscreen extent -2.95,-2.25 2.95,2.25, body extent -2.95,-2.25 2.95,2.25, height 6
LTST-LTL-1CHG-2 [mm] "TH, 2-Leads, Dia 3.8mm"
  rect 1.4x1.4 hole 0.9: 1(-1.27,0)
  round 1.4 hole 0.9: 2(1.27,0)
  silkscreen extent -2.87,-0.25 -2.37,0.25, body extent -1.9,-1.9 1.9,1.9, height 6.5
max17048g+t10 [mm]
  rrect25% 0.76x0.27 smd: 1(-0.985,0.75) 2(-0.985,0.25) 3(-0.985,-0.25) 4(-0.985,-0.75) 5(0.985,-0.75) 6(0.985,-0.25) 7(0.985,0.25) 8(0.985,0.75)
  rect 0.9x1.3 smd paste-2: 9(0,0)
  silkscreen extent -2.04,-1.2 1.05,1.2, body extent -1,-1 1,1, height 0.8
"NET TIE SMD" [mm]
  rect 1x1 smd mask+0: 1(-1.27,0) 3(0,1.27) 4(0,-1.27)
  rect 1x1 smd paste-2539.97 mask+0: 2(1.27,0)
  rect 2.032x2.032 smd mask+0: 14(0,0)
"NET TIE SMD 2 pin" [mm]
  rect 1x1 smd mask+0: 1(-1.27,0)
  rect 1x1 smd paste-2539.97 mask+0: 2(1.27,0)
  rect 2.032x0.762 smd mask+0: 14(0,0)
OMRON-B3U-1000_V [mm] "SMD, 2-Leads, Body 3x2.5mm"
  rect 0.8x1.7 smd: 1(-1.7,0) 2(1.7,0)
  silkscreen extent -2.77,-1.25 1.5,1.25, body extent -1.5,-1.25 1.5,1.25, height 1.75
"RES 0805 Medium" [mm] "Chip Resistor, 2-Leads, Body 2.1x1.35mm, IPC Medium Density"
  rect 1x1.35 smd: 1(-0.9,0) 2(0.9,0)
  silkscreen extent -0.1,-0.58 0.1,0.58, body extent -1.05,-0.68 1.05,0.67, height 0.6
RES-0603-IPC_B [mm]
  rect 0.859x0.912 smd paste+0 mask+0: 1(-0.777,0) 2(0.777,0)
  silkscreen extent -1.21,-0.86 1.21,0.86, body extent -0.8,-0.4 0.8,0.4, height 0.55
STM-LQFP48_M [mm] "QFP, 48-Leads, Body 7x7mm, Pitch 0.5mm, IPC Low Density"
  oval 2.1x0.3 smd: 1(-4.1,2.75) 2(-4.1,2.25) 3(-4.1,1.75) 4(-4.1,1.25) 5(-4.1,0.75) 6(-4.1,0.25) 7(-4.1,-0.25) 8(-4.1,-0.75) 9(-4.1,-1.25) 10(-4.1,-1.75) 11(-4.1,-2.25) 12(-4.1,-2.75) 25(4.1,-2.75) 26(4.1,-2.25) 27(4.1,-1.75) 28(4.1,-1.25) 29(4.1,-0.75) 30(4.1,-0.25) 31(4.1,0.25) 32(4.1,0.75) 33(4.1,1.25) 34(4.1,1.75) 35(4.1,2.25) 36(4.1,2.75)
  oval 0.3x2.1 smd: 13(-2.75,-4.1) 14(-2.25,-4.1) 15(-1.75,-4.1) 16(-1.25,-4.1) 17(-0.75,-4.1) 18(-0.25,-4.1) 19(0.25,-4.1) 20(0.75,-4.1) 21(1.25,-4.1) 22(1.75,-4.1) 23(2.25,-4.1) 24(2.75,-4.1) 37(2.75,4.1) 38(2.25,4.1) 39(1.75,4.1) 40(1.25,4.1) 41(0.75,4.1) 42(0.25,4.1) 43(-0.25,4.1) 44(-0.75,4.1) 45(-1.25,4.1) 46(-1.75,4.1) 47(-2.25,4.1) 48(-2.75,4.1)
  silkscreen extent -4.22,-2.65 2.65,3.57, body extent -3.5,-3.5 3.5,3.5, height 1.6
XTAL_ABM8AIG-8.000MHZ-1Z-T [mm]
  rect 1.2x1.4 smd: 1(-0.8,1.1) 2(-0.8,-1.1) 3(0.8,-1.1) 4(0.8,1.1)
  silkscreen extent -2.25,-0.08 1.25,1.2, body extent -1.25,-1.6 1.25,1.6, height 0.8

## Part data
C1 C3 C4 C17: library part "10uF CAP 0805 10V", "50V 10uF X5R 卤10% 0805 Multilayer Ceramic Capacitors MLCC - SMD/SMT ROHS", Case/Package=0805, Dielectric Material=Ceramic, Manufacturer="Samsung Electro-Mechanics", Manufacturer Part Number=CL21A106KBYQNNE, Max Operating Temperature=85°C, Min Operating Temperature=-55°C, Supplier Part Number=187-CL21A106KBYQNNE, Tolerance=10%, Voltage Rating=50V, Category="Ceramic Capacitors", China RoHS=Compliant, ComponentLink1Description=https://datasheet.octopart.com:443/CL21A106KBYQNNE-Samsung-Electro-Mechanics-datasheet-182022676.pdf?src-supplier=IHS, ComponentLink1URL=https://datasheet.octopart.com:443/CL21A106KBYQNNE-Samsung-Electro-Mechanics-datasheet-182022676.pdf?src-supplier=IHS, ComponentLink2Description=https://datasheet.octopart.com:443/CL21A106KBYQNNE-Samsung-Electro-Mechanics-datasheet-141347528.pdf?src-supplier=Samsung+SCT, ComponentLink2URL=https://datasheet.octopart.com:443/CL21A106KBYQNNE-Samsung-Electro-Mechanics-datasheet-141347528.pdf?src-supplier=Samsung+SCT, ComponentLink3Description=https://datasheet.octopart.com:443/CL21A106KBYQNNE-Samsung-Electro-Mechanics-datasheet-149154152.pdf?src-supplier=Future+Electronics, ComponentLink3URL=https://datasheet.octopart.com:443/CL21A106KBYQNNE-Samsung-Electro-Mechanics-datasheet-149154152.pdf?src-supplier=Future+Electronics, Height=1.45mm, Lifecycle Status=Production, Material=Ceramic, Mounting Technology="Surface Mount", Number of Terminals=2, Pricing="1=0.49, 10=0.221, 50=0.221, 100=0.197, 1000=0.146, 10000=0.123 (USD)", REACH SVHC=Yes, RoHS=Compliant, Stock=130399, Supplier=Mouser, Voltage Rating (DC)=50V
C2: library part "22uF CAP-0805-IPC-B_2", "10V 22uF X5R 卤10% 0805 Multilayer Ceramic Capacitors MLCC - SMD/SMT ROHS", Case Code (Imperial)=0805, Case Code (Metric)=2012, Dielectric=X5R, Dielectric Material=Ceramic, Manufacturer="Samsung Electro-Mechanics", Manufacturer Part Number=CL21A226KPCLRNC, Max Operating Temperature=85°C, Min Operating Temperature=-55°C, Tolerance=10%, Voltage Rating=10V, Case/Package=0805, Category="Ceramic Capacitors", China RoHS=Compliant, ComponentLink1Description=https://datasheet.octopart.com:443/CL21A226KPCLRNC-Samsung-Electro-Mechanics-datasheet-137006305.pdf?src-supplier=IHS, ComponentLink1URL=https://datasheet.octopart.com:443/CL21A226KPCLRNC-Samsung-Electro-Mechanics-datasheet-137006305.pdf?src-supplier=IHS, ComponentLink2Description=https://datasheet.octopart.com:443/CL21A226KPCLRNC-Samsung-Electro-Mechanics-datasheet-181551865.pdf?src-supplier=Newark, ComponentLink2URL=https://datasheet.octopart.com:443/CL21A226KPCLRNC-Samsung-Electro-Mechanics-datasheet-181551865.pdf?src-supplier=Newark, ComponentLink3Description=https://datasheet.octopart.com:443/CL21A226KPCLRNC-Samsung-Electro-Mechanics-datasheet-110226409.pdf?src-supplier=Future+Electronics, ComponentLink3URL=https://datasheet.octopart.com:443/CL21A226KPCLRNC-Samsung-Electro-Mechanics-datasheet-110226409.pdf?src-supplier=Future+Electronics, ComponentLink4Description=https://datasheet.octopart.com:443/CL21A226KPCLRNC-Samsung-Electro-Mechanics-datasheet-93783782.pdf?src-supplier=Future+Electronics, ComponentLink4URL=https://datasheet.octopart.com:443/CL21A226KPCLRNC-Samsung-Electro-Mechanics-datasheet-93783782.pdf?src-supplier=Future+Electronics, ComponentLink5Description=https://datasheet.octopart.com:443/CL21A226KPCLRNC-Samsung-Electro-Mechanics-datasheet-67374603.pdf?src-supplier=Future+Electronics, ComponentLink5URL=https://datasheet.octopart.com:443/CL21A226KPCLRNC-Samsung-Electro-Mechanics-datasheet-67374603.pdf?src-supplier=Future+Electronics, ComponentLink6Description=https://datasheet.octopart.com:443/CL21A226KPCLRNC-Samsung-Electro-Mechanics-datasheet-149136978.pdf?src-supplier=Future+Electronics, ComponentLink6URL=https://datasheet.octopart.com:443/CL21A226KPCLRNC-Samsung-Electro-Mechanics-datasheet-149136978.pdf?src-supplier=Future+Electronics, ComponentLink7Description=https://datasheet.octopart.com:443/CL21A226KPCLRNC-Samsung-datasheet-8326407.pdf?src-supplier=TME, ComponentLink7URL=https://datasheet.octopart.com:443/CL21A226KPCLRNC-Samsung-datasheet-8326407.pdf?src-supplier=TME, Country of Origin="Mainland China, Philippines, South Korea", Depth=1.25mm, Export Control Classification Number (ECCN) Code=EAR99, Harmonized Tariff Schedule (HTS) Code=8532.24.00.20, Height=850µm, Introduction Date=2011-04-13, Lead Free="Lead Free", Length=2mm, Lifecycle Status=Production, Material=Ceramic, Mounting Technology="Surface Mount", Number of Terminals=2, Packaging="Tape and Reel", Pricing="10=0.117, 100=0.102, 500=0.0764, 1000=0.0696, 2000=0.0605, 4000=0.0514 (GBP)", Radiation Hardening=No, REACH SVHC=Yes, RoHS=Compliant, Schedule B="8532240020, 8532240020|8532240020, 8532240020|8532240020|8532240020, 8532240020|8532240020|8532240020|8532240020", Stock=18202, Supplier=Farnell, Supplier Part Number=CL21A226KPCLRNC, Thickness=939.8µm, Voltage Rating (DC)=10V, Width=1.25mm
C5 C6 C26: library part "1uF CAP-0805-IPC-B_1"
C7 C19 C21 C22 C23 C27: library part CAP-0603-IPC-B, Manufacturer="AVX Interconnect / Elco", Part Number=0603ZC103MAT2A
C8 C12 C13 C20: library part "4.7uF CAP-0805-IPC-B_1"
C9 C10 C11: library part "100nF CAP-0603-IPC-B_1", Manufacturer="AVX Interconnect / Elco", Part Number=0603ZC103MAT2A
C14 C18: library part "1nF CAP-0603-IPC-B_1", Manufacturer="AVX Interconnect / Elco", Part Number=0603ZC103MAT2A
C15: library part "2.7nF CAP-0603-IPC-B_1", Manufacturer="AVX Interconnect / Elco", Part Number=0603ZC103MAT2A
C16: library part "6.8nF CAP-0603-IPC-B_2", Manufacturer="AVX Interconnect / Elco", Part Number=0603ZC103MAT2A
C24 C25: library part "CAP-0603_16V- 16pf_murata", "Ceramic Capacitor for Automotive 16pF  ±5% 100VDC C0G 0603 Paper T/R", Capacitance=16pF, Case Code (Imperial)=0603, Case Code (Metric)=1608, Dielectric=C0G, Max Operating Temperature=125°C, Min Operating Temperature=-55°C, Package Quantity=4000, Ratings=AEC-Q200, Tolerance=5%, Voltage Rating=100V, Case/Package=0603, Depth=0.8mm, Height=0.8mm, Length=1.6mm, Mount="Surface Mount", Packaging="Tape and Reel", Radiation Hardening=No, Termination=SMD/SMT, Thickness=0.035inch, Voltage Rating (DC)=100V, Width=0.031inch
C28 C29: library part "CAP-0603_16V- 8pF_murata", "Ceramic Capacitor for Automotive 16pF  ±5% 100VDC C0G 0603 Paper T/R", Capacitance=16pF, Case Code (Imperial)=0603, Case Code (Metric)=1608, Dielectric=C0G, Max Operating Temperature=125°C, Min Operating Temperature=-55°C, Package Quantity=4000, Ratings=AEC-Q200, Tolerance=5%, Voltage Rating=100V, Case/Package=0603, Depth=0.8mm, Height=0.8mm, Length=1.6mm, Mount="Surface Mount", Packaging="Tape and Reel", Radiation Hardening=No, Termination=SMD/SMT, Thickness=0.035inch, Voltage Rating (DC)=100V, Width=0.031inch
DS1 DS2: library part CMP-007-00019-2, "LED Uni-Color Green, 100 mW, 30 mA, -55 to 100 degC, 2-Pin THD, RoHS, Bulk", Case/Package=Radial, Colour=Green, Forward Current=30mA, Forward Voltage=2.6V, Manufacturer=Lite-On, Max Operating Temperature=100°C, Min Operating Temperature=-55°C, Package Description="2-Pin Through Hole Device, Dia 3.8 mm", Package Quantity=1000, Power=100mW, Datasheet URL=http://datasheet.octopart.com/LTL-1CHG-Lite-On-datasheet-143841.pdf, Datasheet Version=Mar-00, Illumination Colour=Green, Lens Style=Dome, Luminous Intensity=12.6mcd, Manufacturer URL=http://www.us.liteon.com/, Mounting Technology=TH, Nominal Vf=2.1V, Package Reference=LTL-1CHG, Packaging=Bulk, Pins=2, RoHS Compliant=True, Viewing Angle=60degrees
DS3: library part CMP-007-00008-2, "Green LED, 80 mW, 20 mA, -25 to 85 degC, 2-Pin THD", Manufacturer="Shenzhen CGX", Package Description="2-Pin Through Hole Device, Dia 5.9 mm", Case/Package=G502DC, Datasheet URL=http://datasheet.octopart.com/G502DC-Chengguangxing-datasheet-62330340.pdf, Datasheet Version=Sep-14, Manufacturer URL=http://szcgx.com/, Mounting Technology=TH, Package Reference=G502DC, RoHS Compliant=Unknown
E1: "Bluetooth 4.0 module with 4pin base board that can support iphone4s or later.", Package=Package, Check_prices=https://www.snapeda.com/parts/HM-10/Jinan+Huamao+Technology/view-part/?ref=eda, MF="Jinan Huamao Technology", MP=HM-10, SnapEDA_Link=https://www.snapeda.com/parts/HM-10/Jinan+Huamao+Technology/view-part/?ref=snap
FB1: library part "CMP-0686-00639-3 Ferrite bead", "Chip Ferrite Bead, 0805, 600Ω @ 100MHz, 0.2Ω, 25%, 700mA", Case Code (Imperial)=0805, Case Code (Metric)=2012, Current Rating=600mA, DC Current=200mA, DC Resistance (DCR)=210mR, ESR (Equivalent Series Resistance)=600R, Frequency=100MHz, Max Current Rating=700mA, Max Operating Temperature=125°C, Min Operating Temperature=-55°C, Package Quantity=1, Temperature Coefficient=10ppm/°C, Tolerance=25%, Case/Package=0805, Conductor Material=Copper, Core Material=Ferrite, Depth=1.25mm, Height=0.85mm, Impedance=600R, Lead Free="Lead Free", Length=2mm, Material=Steel, Max DC Current=200mA, Number of Circuits=1, Number of Lines=1, Number of Pins=2, Packaging="Tape and Reel", Radiation Hardening=No, REACH SVHC="No SVHC", RoHS Compliant=Yes, Shielding=Unshielded, Termination=SMD/SMT, Test Frequency=100MHz, Width=1.25mm
J1: library part CMP-245163-000001-1, "CONN RCPT USB2.0 TYPEC 5A", Current Rating=5/6.25/1.25/0.25A, Manufacturer=GCT, Package=0, Temperature="-40°C to +85°C", Temperature Range High=+85°C, Temperature Range Low=-40°C, Voltage Rating=20V, Automotive=No, Category=Conn, ComponentLink2Description=Datasheet, ComponentLink2URL=https://gct.co/files/drawings/usb4105.pdf, Conn Orientation="Right Angle", Contact Material=Gold,Nickel, Device Class L1=Connectors, Device Class L2="USB Connectors", Device Class L3=unset, Digikey Description="CONN RCPT USB2.0 TYPEC 5A", Height=3.46mm, Is Female=yes, Lead Free=Yes, Manufacturer Part Number=USB4105-GF-A, Number Of Contacts=16, Octopart=https://octopart.com/usb4105-gf-a-gct-106627878, RoHS=TRUE, Usb Standard="USB 2.0"
J2: library part CMP-2000-05162-1, "Male Header, Pitch 2 mm, 1 x 2 Position, Height 6 mm, Tail Length 3.4 mm, -25 to 85 degC, RoHS, Bulk", Manufacturer=JST, Datasheet URL=http://datasheet.octopart.com/B2B-PH-K-S%28LF%29%28SN%29-JST-datasheet-8324864.pdf, Datasheet Version=Nov-08, Manufacturer URL=http://www.jst.com/home2.html, No of Positions=2, Pitch=2mm, Style/Orientation=StraightHeader/Plug, Termination=Crimp, Type=ShroudedHeader
J3: library part CMP-2000-05888-3, "CONN HEADER VERT 2POS 2.5MM", Color=Natural, Contact Resistance=20mR, Current Rating=3A, Housing Color=White, Insulation Resistance=1GR, Max Operating Temperature=85°C, Max Voltage Rating (AC)=250V, Min Operating Temperature=-25°C, Connector Type="Male Pin", Contact Material=Brass, Contact Plating=Tin, Contact Type="Male Pin", Depth=5.75mm, Fastening Type=Detent, Housing Material=Polyamide, Lead Free="Lead Free", Lead Pitch=2.5mm, Length=7.4mm, Max Current Rating=3A, Max Voltage Rating (DC)=250V, Mount="Through Hole", Number Of Contacts=2, Number of Positions=2, Number of Rows=1, Orientation=Straight, Packaging=Bulk, Pitch=2.5mm, REACH SVHC="No SVHC", Series=XH, Termination=Solder, Voltage Rating=250V, Voltage Rating (AC)=250V, Wire/Cable Gauge=22AWG
J4: library part CMP-14818-000001-1, "AUDIO JACK, 3.5 MM, RT, 4 CONDUC", Current Rating=1A, Manufacturer=CUI, Temperature="-25°C to +85°C", Temperature Range High=+85°C, Temperature Range Low=-25°C, Voltage Rating=12V, Automotive=No, Category=Conn, ComponentLink2Description=Datasheet, ComponentLink2URL=https://www.cui.com/product/resource/sj2-357x-smt.pdf, Conn Orientation=Horizontal, Contact Material=Silver, Device Class L1=Connectors, Device Class L2="Audio / Video Connectors", Device Class L3=unset, Digikey Description="AUDIO JACK, 3.5 MM, RT, 4 CONDUC", Height=5.3mm, Lead Free=Yes, Manufacturer Part Number=SJ2-3574A-SMT-TR, Number Of Contacts=4, Octopart=https://octopart.com/sj2-3574a-smt-tr-cui-77838840, Package=SJ2-3574A-SMT-TR, RoHS=TRUE
J5: library part CMP-15831-000009-1, "CONN HEADER VERT 2POS 2.54MM", Current Rating=3A, Manufacturer=Harwin, Temperature="-40°C to +105°C", Temperature Range High=+105°C, Temperature Range Low=-40°C, Automotive=No, Category=Conn, ComponentLink2Description=Datasheet, ComponentLink2URL=https://cdn.harwin.com/pdfs/M20-999.pdf, Conn Gender=Male, Conn Orientation=Vertical, Contact Material=Tin,Nickel, Device Class L1=Connectors, Device Class L2="Headers and Wire Housings", Device Class L3=unset, Digikey Description="CONN HEADER VERT 2POS 2.54MM", Height=8.99mm, Lead Free=Yes, Manufacturer Part Number=M20-9990246, Mouser Description="2.54mm (0.1\") Pitch SIL Vertical PC Tail Pin Header, 6.1mm mating pin height, tin, 2 contacts", Number Of Contacts=2, Number of Rows=1, Octopart=https://octopart.com/m20-9990246-harwin-2590635, Package=M20-9990246, Pitch=2.54mm, RoHS=TRUE
J6: library part CMP-17439-000304-1, "CONN HEADER VERT 5POS 2.5MM", Color=Green, Contact Resistance=20mR, Flammability Rating="UL94 V-0", Housing Color=White, Insulation Color=Natural, Max Current Rating=3A, Max Operating Temperature=85°C, Max Voltage Rating (AC)=250V, Min Operating Temperature=-25°C, Connector Type=Header, Contact Finish - Mating=TIN, Contact Material=Brass, Contact Plating=Copper, Contact Shape=Square, Contact Type="Male Pin", Depth=5.75mm, Fastening Type=Detent, Housing Material=Polyamide, Insulation Material=Nylon, Lead Free="Lead Free", Length=14.9mm, Mated Stacking Heights=9.8mm, Mount="Through Hole", Number of Positions=5, Number of Rows=1, Orientation=Straight, Packaging=Bulk, Pitch=2.5mm, Series=XH, Termination=Solder, Voltage Rating=250V
L1: library part CMP-1662-00028-2, "Multilayer Type Inductor for Power Lines, 1008 (2520), 2.2μH, 20%, 0.1Ω, 1.3A", Case Code (Imperial)=1008, Case Code (Metric)=2520, Current Rating=1.3A, DC Resistance (DCR)=100mR, Inductance=2.2uH, Inductance Tolerance=20%, Max Operating Temperature=125°C, Min Operating Temperature=-55°C, Package Quantity=3000, Self Resonant Frequency=40MHz, Test Frequency=1MHz, Case/Package=1008, Core Material=Ferrite, DC Current=1.3A, Depth=2.2mm, Height=1.2mm, Height - Seated (Max)=0.039inch, Lead Free="Lead Free", Length=2.5mm, Max DC Current=1.3A, Military Standard=Not, Mount="Surface Mount", Packaging="Tape and Reel", Radiation Hardening=No, REACH SVHC="No SVHC", Series=LQM2HP_G0, Shielding=Shielded, Termination=SMD/SMT, Tolerance=20%, Width=2mm
R1 R3 R7 R8 R15 R40: library part RES-0603-IPC-B, Case/Package=0603, Max Operating Temperature=155°C, Max Power Dissipation=100mW, Min Operating Temperature=-55°C, Resistance=4.7kR, Resistor Type="Thin Film", Temperature Coefficient=50ppm/°C, Tolerance=0.5%, Features="Moisture Resistant", Height=0.022inch, Length=0.063inch, Number of Terminations=2, Packaging="Tape and Reel", RoHS Compliant=Yes, Series=AT, Width=0.032inch
R2 R6: library part CMP-04015-097718-1, "5.1kΩ ±1% 0.1W Chip Resistor 0603 Flat Chip (Anti-Sulfuration) AEC-Q200 Qualified", Case Code (Imperial)=0603, Case Code (Metric)=1608, Max Operating Temperature=155°C, Min Operating Temperature=-55°C, Package Quantity=5000, Power Rating=100mW, Resistance=5.1kR, Temperature Coefficient=100ppm/°C, Tolerance=1%, Voltage Rating=75V, Case/Package=0603, Height=0.45mm, Length=1.6mm, Packaging="Tape and Reel", RoHS Compliant=Yes, Termination=SMD/SMT, Weight=7.1E-05oz, Width=0.8mm
R4: library part "1.87k RES-0805-IPC_B_1", "200mW Thick Film Resistors ±50ppm/℃ ±0.1% 1.87kΩ 0805 Chip Resistor - Surface Mount ROHS", Case/Package=0805, Manufacturer=Panasonic, Manufacturer Lifecycle Status=ACTIVE, Manufacturer Part Number=ERJPB6B1871V, Max Operating Temperature=155°C, Min Operating Temperature=-55°C, Power Rating=250mW, Ratings=AEC-Q200, Temperature Coefficient=50ppm/°C, Tolerance=0.1%, Working Voltage=150V, Category="Chip SMD Resistors", ComponentLink1Description=https://datasheet.octopart.com:443/ERJPB6B1871V-Panasonic-datasheet-182147307.pdf?src-supplier=IHS, ComponentLink1URL=https://datasheet.octopart.com:443/ERJPB6B1871V-Panasonic-datasheet-182147307.pdf?src-supplier=IHS, ComponentLink2Description=https://datasheet.octopart.com:443/ERJPB6B1871V-Panasonic-datasheet-82522998.pdf?src-supplier=Panasonic, ComponentLink2URL=https://datasheet.octopart.com:443/ERJPB6B1871V-Panasonic-datasheet-82522998.pdf?src-supplier=Panasonic, ComponentLink3Description=https://sigma.octopart.com:443/150570796/technical_drawing/Panasonic-ERJPB6B1871V.pdf?src-supplier=Panasonic+SCT, ComponentLink3URL=https://sigma.octopart.com:443/150570796/technical_drawing/Panasonic-ERJPB6B1871V.pdf?src-supplier=Panasonic+SCT, ComponentLink4Description=https://datasheet.octopart.com:443/ERJPB6B1871V-Panasonic-datasheet-177212511.pdf?src-supplier=Burklin+Elektronik, ComponentLink4URL=https://datasheet.octopart.com:443/ERJPB6B1871V-Panasonic-datasheet-177212511.pdf?src-supplier=Burklin+Elektronik, Height=600µm, Length=2mm, Lifecycle Status=Production, Mounting Technology="Surface Mount", Number of Terminals=2, Part Series="High Precision Thick Film Chip Resistors", Pricing="5000=0.0407 (GBP)", REACH SVHC=Yes, RoHS=Compliant, Schedule B=8533210045, Supplier=Farnell, Supplier Part Number=ERJPB6B1871V, Width=1.25mm
R5: library part "8.25k RES-0603-IPC-B_1", "Res Thin Film 0603 8.25K Ohm 0.1% 0.1W(1/10W) ±25ppm/C Pad SMD T/R Automotive AEC-Q200", Case Code (Imperial)=0603, Case Code (Metric)=1608, Manufacturer=Panasonic, Manufacturer Lifecycle Status=ACTIVE, Manufacturer Part Number=ERA3AEB8251V, Max Operating Temperature=155°C, Max Power Dissipation=100mW, Min Operating Temperature=-55°C, Ratings=AEC-Q200, Resistance=4.7kR, Resistor Type="Thin Film", Temperature Coefficient=50ppm/°C, Tolerance=0.5%, Voltage Rating=75V, Case/Package=0603, Category="Chip SMD Resistors", ComponentLink1Description=https://datasheet.octopart.com:443/ERA3AEB8251V-Panasonic-datasheet-62287448.pdf?src-supplier=Future+Electronics, ComponentLink1URL=https://datasheet.octopart.com:443/ERA3AEB8251V-Panasonic-datasheet-62287448.pdf?src-supplier=Future+Electronics, ComponentLink2Description=https://datasheet.octopart.com:443/ERA3AEB8251V-Panasonic-datasheet-8367715.pdf?src-supplier=Newark, ComponentLink2URL=https://datasheet.octopart.com:443/ERA3AEB8251V-Panasonic-datasheet-8367715.pdf?src-supplier=Newark, ComponentLink3Description=https://datasheet.octopart.com:443/ERA3AEB8251V-Panasonic-datasheet-136531316.pdf?src-supplier=Newark, ComponentLink3URL=https://datasheet.octopart.com:443/ERA3AEB8251V-Panasonic-datasheet-136531316.pdf?src-supplier=Newark, ComponentLink4Description=https://datasheet.octopart.com:443/ERA-3AEB8251V-Panasonic-datasheet-184398012.pdf?src-supplier=Newark, ComponentLink4URL=https://datasheet.octopart.com:443/ERA-3AEB8251V-Panasonic-datasheet-184398012.pdf?src-supplier=Newark, ComponentLink5Description=https://datasheet.octopart.com:443/ERA-3AEB8251V-Panasonic-datasheet-154766165.pdf?src-supplier=JRH+Electronics, ComponentLink5URL=https://datasheet.octopart.com:443/ERA-3AEB8251V-Panasonic-datasheet-154766165.pdf?src-supplier=JRH+Electronics, ComponentLink6Description=https://datasheet.octopart.com:443/ERA3AEB8251V-Panasonic-datasheet-13266200.pdf?src-supplier=_legacy+Avnet, ComponentLink6URL=https://datasheet.octopart.com:443/ERA3AEB8251V-Panasonic-datasheet-13266200.pdf?src-supplier=_legacy+Avnet, ComponentLink7Description=https://datasheet.octopart.com:443/ERA3AEB8251V-Panasonic-datasheet-12510007.pdf?src-supplier=_legacy+Avnet, ComponentLink7URL=https://datasheet.octopart.com:443/ERA3AEB8251V-Panasonic-datasheet-12510007.pdf?src-supplier=_legacy+Avnet, ComponentLink8Description=https://datasheet.octopart.com:443/ERA3AEB8251V-Panasonic-datasheet-11763931.pdf?src-supplier=_legacy+Avnet, ComponentLink8URL=https://datasheet.octopart.com:443/ERA3AEB8251V-Panasonic-datasheet-11763931.pdf?src-supplier=_legacy+Avnet, ComponentLink9Description=https://datasheet.octopart.com:443/ERA3AEB8251V-Panasonic-datasheet-10840895.pdf?src-supplier=_legacy+Avnet, ComponentLink9URL=https://datasheet.octopart.com:443/ERA3AEB8251V-Panasonic-datasheet-10840895.pdf?src-supplier=_legacy+Avnet, ComponentLink10Description=https://datasheet.octopart.com:443/ERA3AEB8251V-Panasonic-datasheet-5392808.pdf?src-supplier=_legacy+Avnet, ComponentLink10URL=https://datasheet.octopart.com:443/ERA3AEB8251V-Panasonic-datasheet-5392808.pdf?src-supplier=_legacy+Avnet, ComponentLink11Description=https://datasheet.octopart.com:443/ERA3AEB8251V-Panasonic-datasheet-188913046.pdf?src-supplier=TME, ComponentLink11URL=https://datasheet.octopart.com:443/ERA3AEB8251V-Panasonic-datasheet-188913046.pdf?src-supplier=TME, ComponentLink12Description=https://sigma.octopart.com:443/150570796/technical_drawing/Panasonic-ERA3AEB8251V.pdf?src-supplier=Panasonic+SCT, ComponentLink12URL=https://sigma.octopart.com:443/150570796/technical_drawing/Panasonic-ERA3AEB8251V.pdf?src-supplier=Panasonic+SCT, ComponentLink13Description=https://datasheet.octopart.com:443/ERA3AEB8251V-Panasonic-datasheet-138783076.pdf?src-supplier=Burklin+Elektronik, ComponentLink13URL=https://datasheet.octopart.com:443/ERA3AEB8251V-Panasonic-datasheet-138783076.pdf?src-supplier=Burklin+Elektronik, ComponentLink14Description=https://datasheet.octopart.com/ERA3AEB8251V-Panasonic-datasheet-78375410.pdf, ComponentLink14URL=https://datasheet.octopart.com/ERA3AEB8251V-Panasonic-datasheet-78375410.pdf, ComponentLink15Description=https://datasheet.octopart.com:443/ERA3AEB8251V-Panasonic---ECG-datasheet-15994758.pdf?src-supplier=Farnell, ComponentLink15URL=https://datasheet.octopart.com:443/ERA3AEB8251V-Panasonic---ECG-datasheet-15994758.pdf?src-supplier=Farnell, ComponentLink16Description=https://datasheet.octopart.com:443/ERA3AEB8251V-Panasonic-datasheet-33006989.pdf?src-supplier=Electro+Sonic, ComponentLink16URL=https://datasheet.octopart.com:443/ERA3AEB8251V-Panasonic-datasheet-33006989.pdf?src-supplier=Electro+Sonic, ComponentLink17Description=https://datasheet.octopart.com:443/ERA-3AEB8251V-Panasonic-datasheet-46744048.pdf?src-supplier=Electro+Sonic, ComponentLink17URL=https://datasheet.octopart.com:443/ERA-3AEB8251V-Panasonic-datasheet-46744048.pdf?src-supplier=Electro+Sonic, Composition="Thin Film", Contact Plating=Tin, Country of Origin=Japan, Depth=800µm, Export Control Classification Number (ECCN) Code=EAR99, Features="Moisture Resistant", Harmonized Tariff Schedule (HTS) Code=8533.21.00.30, Height=0.022inch, Introduction Date=2011-03-24, Lead Free="Lead Free", Length=0.063inch, Lifecycle Status=Production, Military Standard=Not, Mounting Technology="Surface Mount", Number of Terminals=2, Number of Terminations=2, Packaging="Tape and Reel", Part Series="Thin Film Chip Resistors, High Reliability Type", Pins=2, Power Rating=100mW, Pricing="5000=0.0315 (GBP)", Radiation Hardening=No, REACH SVHC=Yes, RoHS=Compliant, RoHS Compliant=Yes, Schedule B="8533210045, 8533210045|8533210045, 8533210045|8533210045|8533210045, 8533210045|8533210045|8533210045|8533210045", Series=AT, Stock=5000, Supplier=Farnell, Supplier Part Number=ERA3AEB8251V, Termination=SMD/SMT, Voltage Rating (DC)=75V, Width=0.032inch, Working Voltage=75V
R9 R11: library part RES-0805-IPC_B
R10: library part "1.18k RES-0603-IPC-B_3", Case/Package=0603, Max Operating Temperature=155°C, Max Power Dissipation=100mW, Min Operating Temperature=-55°C, Resistance=4.7kR, Resistor Type="Thin Film", Temperature Coefficient=50ppm/°C, Tolerance=0.5%, Features="Moisture Resistant", Height=0.022inch, Length=0.063inch, Number of Terminations=2, Packaging="Tape and Reel", RoHS Compliant=Yes, Series=AT, Width=0.032inch
R12: library part "4.12k RES-0603-IPC-B_1", Case/Package=0603, Max Operating Temperature=155°C, Max Power Dissipation=100mW, Min Operating Temperature=-55°C, Resistance=4.7kR, Resistor Type="Thin Film", Temperature Coefficient=50ppm/°C, Tolerance=0.5%, Features="Moisture Resistant", Height=0.022inch, Length=0.063inch, Number of Terminations=2, Packaging="Tape and Reel", RoHS Compliant=Yes, Series=AT, Width=0.032inch
R13: library part "1.13k RES-0603-IPC-B_2", Case/Package=0603, Max Operating Temperature=155°C, Max Power Dissipation=100mW, Min Operating Temperature=-55°C, Resistance=4.7kR, Resistor Type="Thin Film", Temperature Coefficient=50ppm/°C, Tolerance=0.5%, Features="Moisture Resistant", Height=0.022inch, Length=0.063inch, Number of Terminations=2, Packaging="Tape and Reel", RoHS Compliant=Yes, Series=AT, Width=0.032inch
R14: library part CMP-02404-000013-1, "THERM NTC 10KOHM 3435K RADIAL", Case/Package=Radial, Max Operating Temperature=125°C, Max Power Dissipation=250mW, Min Operating Temperature=-40°C, Tolerance=1%, Mount="Through Hole", Packaging=Bulk, RoHS Compliant=Yes
R16 R17 R19 R20 R21 R22: library part "10M RES-0603-IPC-B_4", Case/Package=0603, Max Operating Temperature=155°C, Max Power Dissipation=100mW, Min Operating Temperature=-55°C, Resistance=4.7kR, Resistor Type="Thin Film", Temperature Coefficient=50ppm/°C, Tolerance=0.5%, Features="Moisture Resistant", Height=0.022inch, Length=0.063inch, Number of Terminations=2, Packaging="Tape and Reel", RoHS Compliant=Yes, Series=AT, Width=0.032inch
R18 R23 R27 R28 R31: library part "1M RES-0603-IPC-B_3", Case/Package=0603, Max Operating Temperature=155°C, Max Power Dissipation=100mW, Min Operating Temperature=-55°C, Resistance=4.7kR, Resistor Type="Thin Film", Temperature Coefficient=50ppm/°C, Tolerance=0.5%, Features="Moisture Resistant", Height=0.022inch, Length=0.063inch, Number of Terminations=2, Packaging="Tape and Reel", RoHS Compliant=Yes, Series=AT, Width=0.032inch
R24 R26: library part "180k RES-0603-IPC-B_2", Case/Package=0603, Max Operating Temperature=155°C, Max Power Dissipation=100mW, Min Operating Temperature=-55°C, Resistance=4.7kR, Resistor Type="Thin Film", Temperature Coefficient=50ppm/°C, Tolerance=0.5%, Features="Moisture Resistant", Height=0.022inch, Length=0.063inch, Number of Terminations=2, Packaging="Tape and Reel", RoHS Compliant=Yes, Series=AT, Width=0.032inch
R25: library part "100k RES-0603-IPC-B_1", Case/Package=0603, Max Operating Temperature=155°C, Max Power Dissipation=100mW, Min Operating Temperature=-55°C, Resistance=4.7kR, Resistor Type="Thin Film", Temperature Coefficient=50ppm/°C, Tolerance=0.5%, Features="Moisture Resistant", Height=0.022inch, Length=0.063inch, Number of Terminations=2, Packaging="Tape and Reel", RoHS Compliant=Yes, Series=AT, Width=0.032inch
R29: library part "360K RES-0805-IPC_B_2"
R30: library part "332K RES-0805-IPC_B_1"
R32 R100: Case/Package=0603, Max Operating Temperature=155°C, Max Power Dissipation=100mW, Min Operating Temperature=-55°C, Resistance=4.7kR, Resistor Type="Thin Film", Temperature Coefficient=50ppm/°C, Tolerance=0.5%, Features="Moisture Resistant", Height=0.022inch, Length=0.063inch, Number of Terminations=2, Packaging="Tape and Reel", RoHS Compliant=Yes, Series=AT, Width=0.032inch
R33 R35: library part "1k RES-0603-IPC-B_1", Case/Package=0603, Max Operating Temperature=155°C, Max Power Dissipation=100mW, Min Operating Temperature=-55°C, Resistance=4.7kR, Resistor Type="Thin Film", Temperature Coefficient=50ppm/°C, Tolerance=0.5%, Features="Moisture Resistant", Height=0.022inch, Length=0.063inch, Number of Terminations=2, Packaging="Tape and Reel", RoHS Compliant=Yes, Series=AT, Width=0.032inch
R34 R36 R37 R38 R39: library part "10k RES-0603-IPC-B_1_1", Case/Package=0603, Max Operating Temperature=155°C, Max Power Dissipation=100mW, Min Operating Temperature=-55°C, Resistance=4.7kR, Resistor Type="Thin Film", Temperature Coefficient=50ppm/°C, Tolerance=0.5%, Features="Moisture Resistant", Height=0.022inch, Length=0.063inch, Number of Terminations=2, Packaging="Tape and Reel", RoHS Compliant=Yes, Series=AT, Width=0.032inch